# Altium PCB PCB2_v2.PcbDoc
Units mil, origin at the board's own origin, x right, y up, seen from the top; angles counter-clockwise.
Board outline 3972.44 x 4354.33 mil, 2 copper layers (Top Layer, Bottom Layer); 21 components, 15 nets, 119 pads, 3 vias.
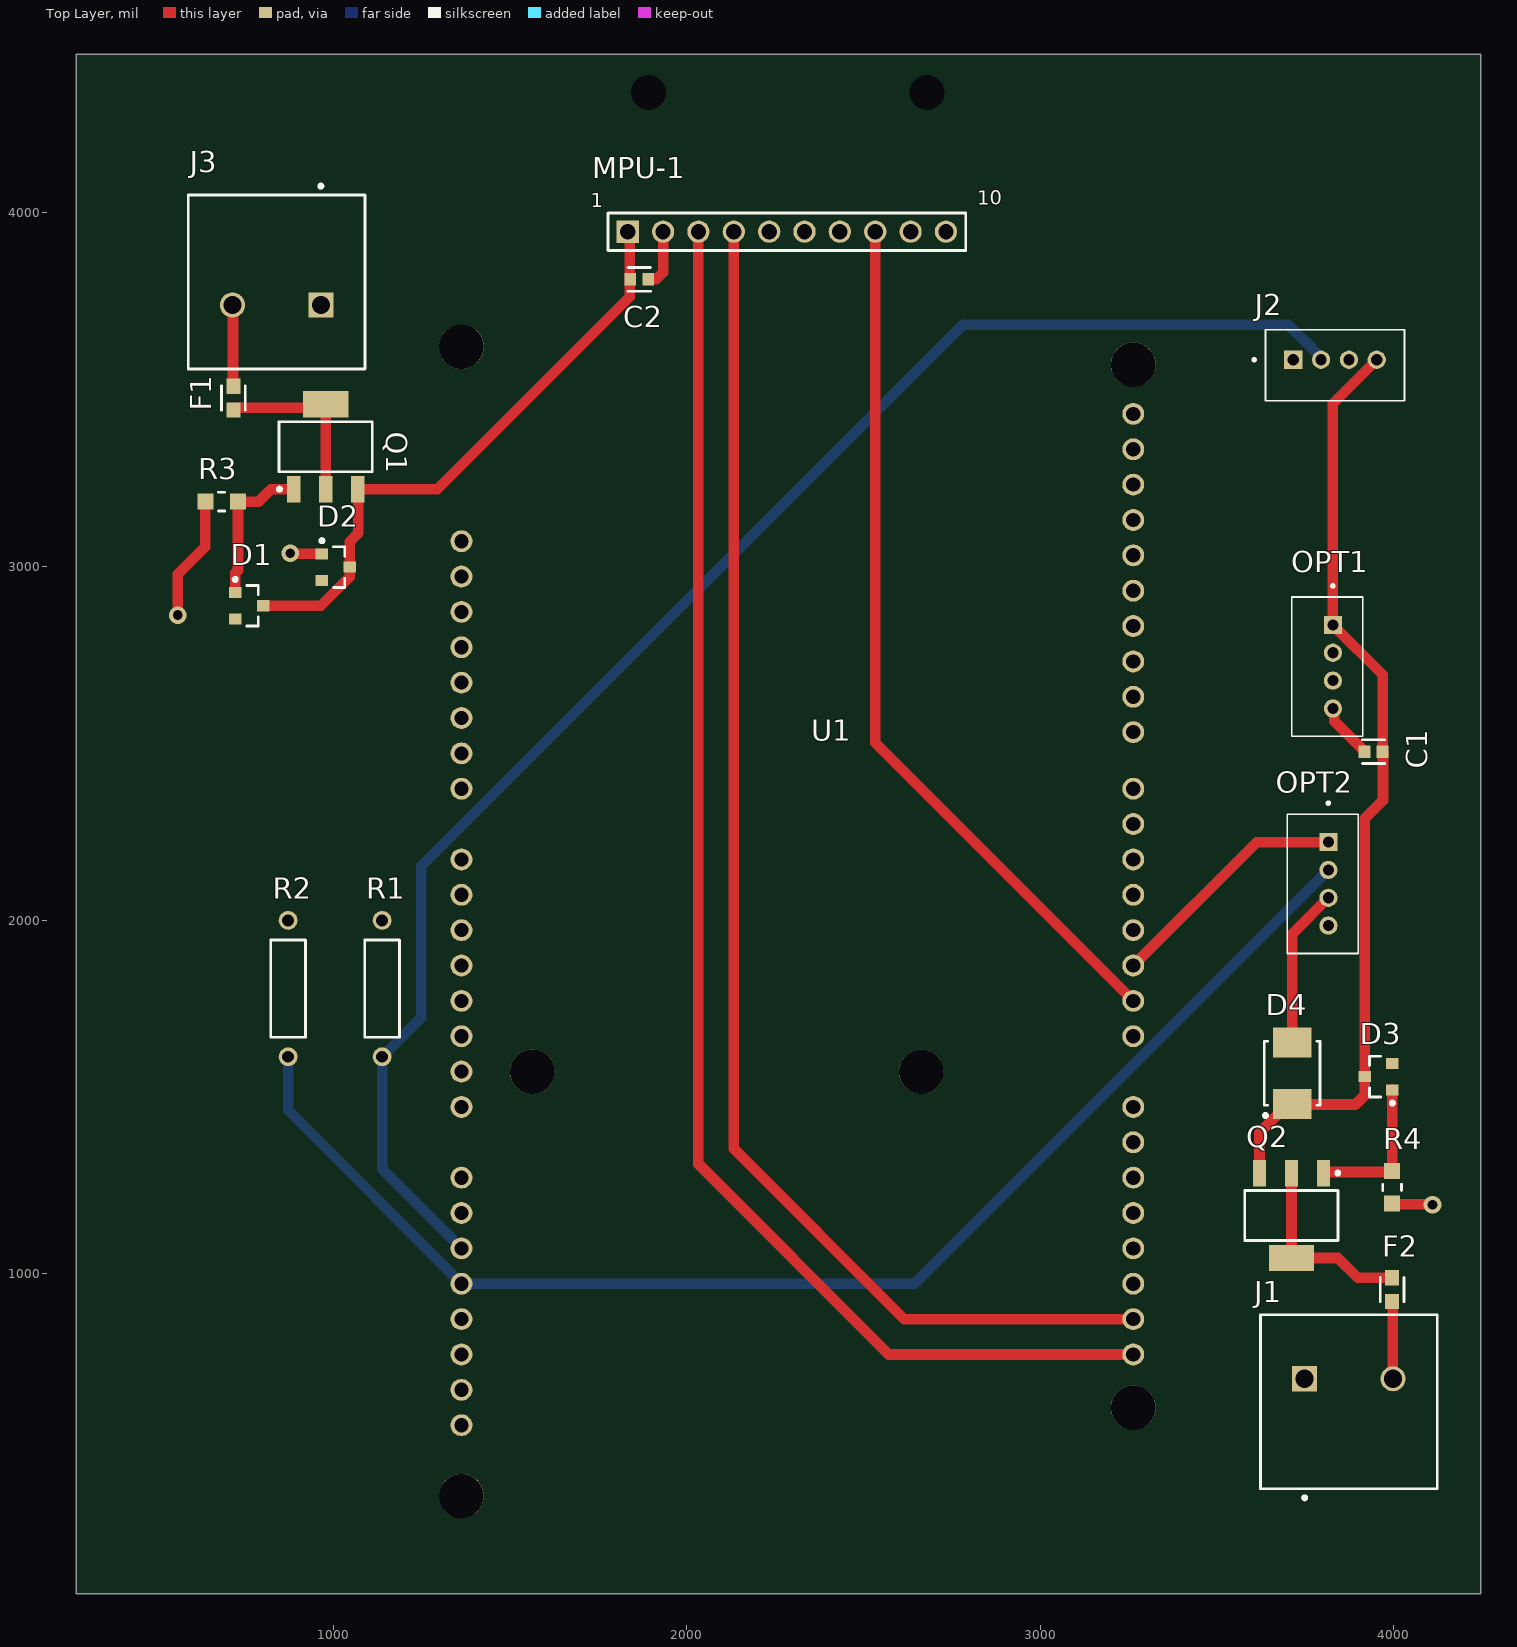
[diagram p0: Top Layer view]
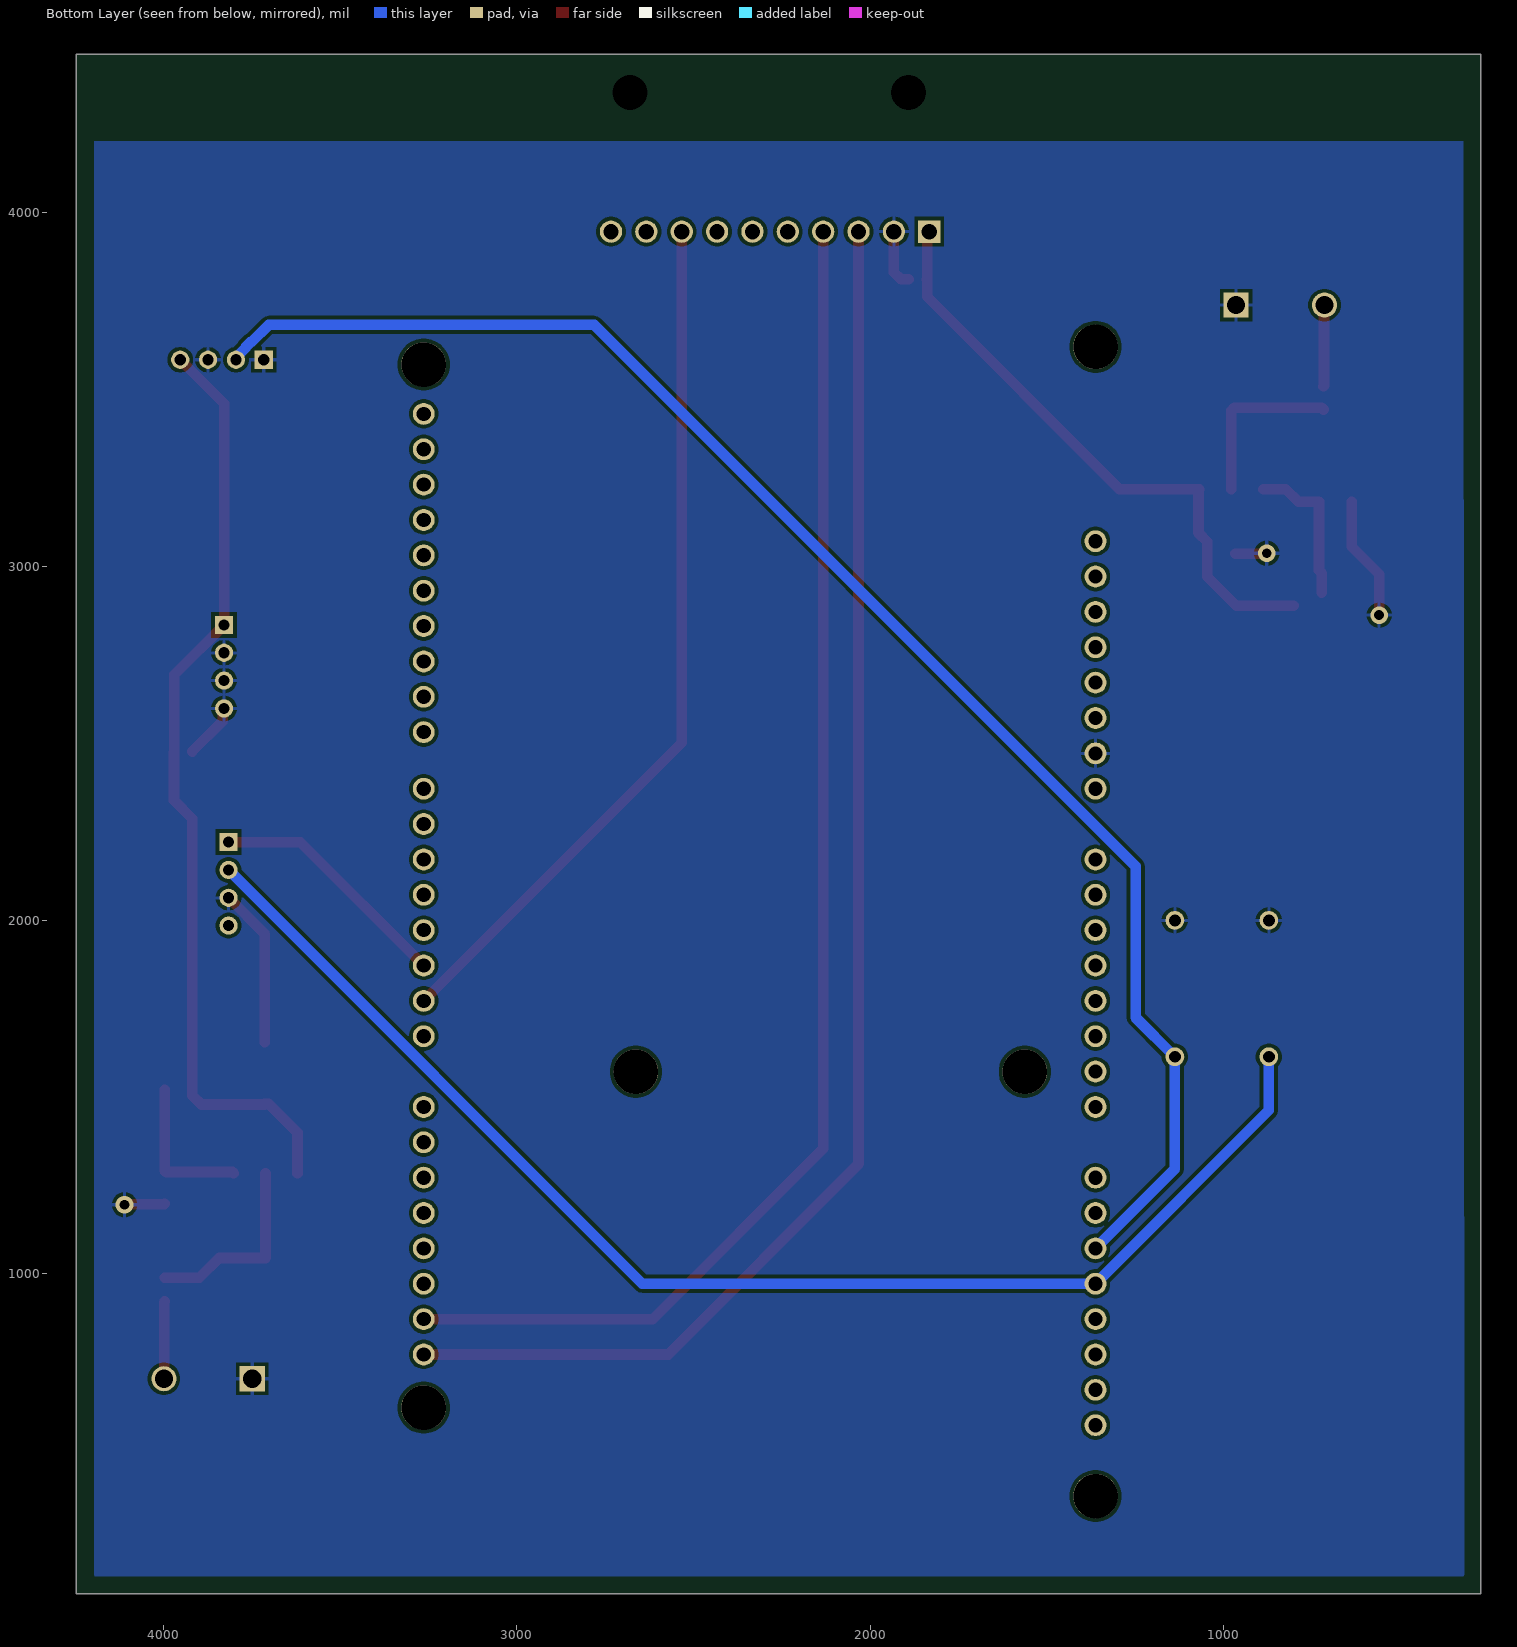
[diagram p1: Bottom Layer view, seen from below]

## Layer stack, top to bottom
Top Solder: solder mask 0.4, Solder Resist, Dk 3.5
Top Layer: signal copper 1.4
Dielectric 1: dielectric 12.6, FR-4, Dk 4.8
Bottom Layer: signal copper 1.4
Bottom Solder: solder mask 0.4, Solder Resist, Dk 3.5

## Board outline
273.62,94.49 4246.06,94.49 4246.06,4448.82 273.62,4448.82

## Design rules (kind name [scope] priority, off if disabled: settings)
Clearance [All] p1: gap=10 ignorepadtopadclearanceinfootprint=FALSE except(0: Arc-Hole Track-Hole SMDPad-Hole THPad-Hole Via-Hole Fill-Hole Poly-Hole Region-Hole Text-Hole)
PolygonConnect [All] p1: connectstyle=Relief reliefconductorwidth=10 reliefentries=4 polygonreliefangle="90 Angle" airgapwidth=10
RoutingVias [All] p1: holewidth=28 width=50 viastyle="Through Hole" minholewidth=28 minwidth=50 maxholewidth=28 maxwidth=50
SolderMaskExpansion [All] p1: expansion=4 istentingtop=FALSE
Width [All] p1: maxlimit=30 minlimit=10 preferedwidth=20 minimp=50.000000 maximp=50.000000 favimp=50.000000
30 further rules are at their usual default settings.

## Classes and differential pairs
component class "Protection Circuit 24V": D3 D4 F2 Q2 R4
component class "Protection Circuit 5V": D1 D2 F1 Q1 R3
component class PCB2_Schematic: C1 C2 J1 J3 MPU-1 OPT1 OPT2 R1 R2 U1

## Components (designator, comment, footprint, x,y, rotation, side; value= is the part's Value field where it differs from the comment)
C1 "C0603X104K5RACTU" FP-C0603-CJ-MFG 3942.91,2476.38 r180 top value=100nF
C2 "C0603X104K5RACTU" FP-C0603-CJ-MFG 1866.14,3812.01 r0 top value=100nF
D1 "Zener" ONSC-SOT-23-3-318-08_V 762.8,2888.78 r0 top
D2 "Zener" ONSC-SOT-23-3-318-08_V 1007.87,2998.03 r0 top
D3 "Zener 1" ONSC-SOT-23-3-318-08_V 3956.69,1557.09 r180 top
D4 "Zener 2" ONSC-SMB-2-403A-03_H_V 3712.6,1566.93 r90 top
F1 "1A Fuse" FP-0603SFS-MFG 718.5,3476.38 r270 top value=0.2Ω
F2 "1A Fuse" FP-0603SFS-MFG 3995.08,954.72 r90 top value=0.2Ω
J1 "Screw Conn." PHOE-1714955_V 3873.03,702.76 r0 top
J2 "AcuAmp" SEEED_110990030 3833.66,3584.65 r0 top
J3 "Screw Conn." PHOE-1714955_V 840.55,3739.17 r180 top
MPU-1 "61301011121" 61301011121 2283.46,3946.85 r0 top
OPT1 "110990030" SEEED_110990030 3827.76,2716.54 r270 top
OPT2 "110990030" SEEED_110990030 3814.96,2102.36 r270 top
Q1 "PMOS" FAIR-SOT223-4_V 979.33,3338.58 r90 top
Q2 "PMOS" FAIR-SOT223-4_V 3710.63,1164.37 r270 top
R1 "OD103JE" OMTE-RES7X2.5-2 1138.78,1806.1 r270 top
R2 "OD103JE" OMTE-RES7X2.5-2 873.03,1806.1 r270 top
R3 "100 kOhm" FP-CR0805-MFG 685.04,3183.07 r0 top
R4 "100 kOhms" FP-CR0805-MFG 3995.08,1244.09 r90 top
U1 "DUE_CONNECTOR" DUE_FOOTPRINT 1363.19,3071.46 r0 top

## Footprints (in the part's own frame and the unit in brackets; to place one, negate y for a bottom-side part, rotate by r counter-clockwise, add the part's x,y. Pads: shape width x height; smd on the part's side, far side on the other; paste and mask are expansions set on the pad)
61301011121 [mm] "Pin Header, pitch 2.54 mm, THT, Vertical, single row, 10p"
  rect 1.6x1.6 hole 1.1: 1(-11.43,0)
  round 1.6 hole 1.1: 2(-8.89,0) 3(-6.35,0) 4(-3.81,0) 5(-1.27,0) 6(1.27,0) 7(3.81,0) 8(6.35,0) 9(8.89,0) 10(11.43,0)
  silkscreen extent -12.85,-1.35 12.85,1.35, body extent -12.7,-1.27 12.7,1.27, height 8.57
DUE_FOOTPRINT [mm]
  round 1.57 hole 1.02: 0(0,0) 1(0,-2.54) 2(0,-5.08) 3(0,-7.62) 4(0,-10.16) 5(0,-12.7) 6(0,-15.24) 7(0,-17.78) 8(0,-22.86) 9(0,-25.4) 10(0,-27.94) 11(0,-30.48) 12(0,-33.02) 13(0,-35.56) 14(0,-38.1) 15(0,-40.64) 16(0,-45.72) 17(0,-48.26) 18(0,-50.8) 19(0,-53.34) 20(0,-55.88) 21(0,-58.42) 22(0,-60.96) 23(0,-63.5) 24(48.26,-58.42) 25(48.26,-55.88) 26(48.26,-53.34) 27(48.26,-50.8) 28(48.26,-48.26) 29(48.26,-45.72) 30(48.26,-43.18) 31(48.26,-40.64) 32(48.26,-35.56) 33(48.26,-33.02) 34(48.26,-30.48) 35(48.26,-27.94) 36(48.26,-25.4) 37(48.26,-22.86) 38(48.26,-20.32) 39(48.26,-17.78) 40(48.26,-13.716) 41(48.26,-11.176) 42(48.26,-8.636) 43(48.26,-6.096) 44(48.26,-3.556) 45(48.26,-1.016) 46(48.26,1.524) 47(48.26,4.064) 48(48.26,6.604) 49(48.26,9.144)
  body extent -1.27,-64.77 49.53,10.41, height 9.5
FAIR-SOT223-4_V [mm] "SOT223, 4-Leads, Body 6.7x3.7mm, Pitch 2.3mm"
  rect 1.9x0.95 smd: 1(-3.05,2.3) 2(-3.05,0) 3(-3.05,-2.3)
  rect 1.9x3.25 smd: 4(3.05,0)
  silkscreen extent -3.17,-3.35 1.8,3.45, body extent -3.5,-3.35 3.5,3.35, height 1.8
FP-0603SFS-MFG [mil]
  rect 43x39 smd paste+0 mask+0: 1(-33.5,0) 2(33.5,0)
  silkscreen extent -34,-33 34,33, body extent -59,-23 59,23, height 10
FP-C0603-CJ-MFG [mm]
  rect 0.85x0.9 smd paste+0 mask+0: 1(-0.65,0) 2(0.65,0)
  silkscreen extent -0.8,-0.85 0.8,0.85, body extent -1.2,-0.6 1.2,0.6, height 0.25
FP-CR0805-MFG [mm]
  rect 1.15x1.15 smd paste+0 mask+0: 1(-1.175,0) 2(1.175,0)
  silkscreen extent -0.23,-0.67 0.23,0.67, body extent -1.85,-0.77 1.85,0.77, height 0.25
OMTE-RES7X2.5-2 [mm] "Resistor, Axial; Body 7x2.5mm, Lead Dia. 0.6mm"
  round 1.35 hole 0.85: 1(-4.9,0) 2(4.9,0)
  silkscreen extent -3.5,-1.25 3.5,1.25, body extent -3.5,-1.25 3.5,1.25, height 2.5
ONSC-SMB-2-403A-03_H_V [mil] "Molded, 2-Leads, Body 4.6x3.95mm"
  rect 85x107.99 smd: 1(-87.01,0) 2(87.01,0)
  silkscreen extent -125,-79 91,81, body extent -91,-78 91,78, height 95
ONSC-SOT-23-3-318-08_V [mm] "SOT23, 3-Leads, Body 2.92x1.3mm, Pitch 0.95mm"
  rect 0.9x0.8 smd: 1(-1,0.95) 2(-1,-0.95) 3(1,0)
  silkscreen extent -1.12,-1.46 0.65,2.02, body extent -0.65,-1.46 0.65,1.46, height 1.11
PHOE-1714955_V [mm] "Terminal Block, 2-Leads, Body 12.7x12.5mm, Pitch 6.35mm"
  rect 1.8x1.8 hole 1.3: 1(-3.175,0)
  round 1.8 hole 1.3: 2(3.175,0)
  silkscreen extent -6.35,-8.67 6.35,4.6, body extent -6.92,-7.9 6.35,4.6, height 21.51
SEEED_110990030 [mm]
  rect 1.308x1.308 hole 0.8: 1(-3,0)
  round 1.308 hole 0.8: 2(-1,0) 3(1,0) 4(3,0)
  silkscreen extent -5.9,-2.95 5,2.15

## Part data
C1 C2: library part CMP-2006-03300-2, "CAP CER 0.1UF 50V X7R 0603", Capacitance=100nF, Manufacturer=Kemet, Package=C0603-CJ, Temperature="-55°C to +125°C", Temperature Characteristic=X7R, Temperature Coefficient=15%, Temperature Range High=+125°C, Temperature Range Low=-55°C, Tolerance=10%, Voltage=50V, Automotive=No, Category=Cap, ComponentLink2Description=Datasheet, ComponentLink2URL=https://content.kemet.com/datasheets/KEM_C1013_X7R_FT-CAP_SMD.pdf, Device Class L1="Passive Components", Device Class L2=Capacitors, Device Class L3="Ceramic Capacitors", Digikey Description="CAP CER 0.1UF 50V X7R 0603", Height=0.95mm, Ipc Land Pattern Name=CAPC16080X80, Lead Free=Yes, Manufacturer Part Number=C0603X104K5RACTU, Material=Ceramic, Mouser Description="Capacitor; Ceramic; Cap 0.1uF; Tol+10%; SMT; Flexible Termination; Vol-Rtg 50V; TR", Octopart=https://octopart.com/c0603x104k5ractu-kemet-9145062, RoHS=TRUE, Voltage Rating=50V
D1 D3: library part CMP-1060-01182-1, "Zener Voltage Regulator, 225 mW, 3-Pin SOT-23, Pb-Free, Tape and Reel", Manufacturer="On Semiconductor", PartNumber=MMBZ5245BLT3G, ComponentLink1Description="Manufacturer URL", ComponentLink1URL=http://www.onsemi.com/, ComponentLink2Description=Datasheet, ComponentLink2URL=http://www.onsemi.cn/pub_link/Collateral/MMBZ5221BLT1-D.PDF, ComponentLink3Description="Package Specification", ComponentLink3URL=http://www.onsemi.cn/pub_link/Collateral/318-08.PDF, DatasheetVersion="Rev. 12", Mounting Technology="Surface Mount", PackageDescription="3-Pin Small Outline Transistor, Body 2.92 x 1.3 mm, Pitch 0.95 mm", PackageReference=SOT-23-3-318-08, PackageVersion="Rev. AP, 11/2009", Packing="Tape and Reel", RoHS=Pb-Free, VZ Typ (V)=15
D2: library part CMP-1060-01193-1, "Zener Voltage Regulator, 225 mW, 3-Pin SOT-23, Pb-Free, Tape and Reel", Manufacturer="On Semiconductor", PartNumber=SZBZX84C39ET1G, ComponentLink1Description="Manufacturer URL", ComponentLink1URL=http://www.onsemi.com/, ComponentLink2Description=Datasheet, ComponentLink2URL=http://www.onsemi.com/pub_link/Collateral/BZX84C2V4ET1-D.PDF, ComponentLink3Description="Package Specification", ComponentLink3URL=http://www.onsemi.cn/pub_link/Collateral/318-08.PDF, DatasheetVersion="Rev. 8", Mounting Technology="Surface Mount", PackageDescription="3-Pin Small Outline Transistor, Body 2.92 x 1.3 mm, Pitch 0.95 mm", PackageReference=SOT-23-3-318-08, PackageVersion="Rev. AP, 11/2009", Packing="Tape and Reel", RoHS=Pb-Free
D4: library part CMP-1060-00141-1, "3 W Zener Voltage Regulator, 2-Pin SMB, Pb-Free, Tape and Reel", Manufacturer="On Semiconductor", PartNumber=1SMB5934BT3G, ComponentLink1Description="Manufacturer URL", ComponentLink1URL=http://www.onsemi.com/, ComponentLink2Description=Datasheet, ComponentLink2URL=http://www.onsemi.com/pub_link/Collateral/1SMB5913BT3-D.PDF, ComponentLink3Description="Package Specification", ComponentLink3URL=http://www.onsemi.com/pub_link/Collateral/1SMB5913BT3-D.PDF, DatasheetVersion="Rev. 8", Mounting Technology="Surface Mount", PackageDescription="2-Pin Small Molded Package, J-Bend Lead, Body 4.33 x 3.625 mm", PackageReference=SMB-2-403A-03_H, PackageVersion="Rev. H, 05/2011", Packing="Tape and Reel", RoHS=Pb-Free, VZ Typ (V)=24
F1 F2: library part CMP-08605-000034-1, "FUSE BOARD MOUNT 1A 32VDC 0603", Fuse Current=1A, Fuse Interrupt Dc Current=50A, Manufacturer=Littelfuse, Manufacturer Part Number=0603SFS100F/32-2, Max Fuse Dc Voltage=32V, Package=0603SFS, Resistance=0.2Ω, Temperature="-55°C to +125°C", Temperature Range High=+125°C, Temperature Range Low=-55°C, Automotive=No, Category=Fuse, ComponentLink2Description=Datasheet, ComponentLink2URL=https://www.littelfuse.com/~/media/electronics/datasheets/fuses/littelfuse_fuse_sfs_datasheet.pdf.pdf, Device Class L1="Circuit Protection", Device Class L2=Fuses, Device Class L3=unset, Digikey Description="FUSE BOARD MOUNT 1A 32VDC 0603", Fuse Blow Speed=Slow, Fuse I2T=0.093A2Sec, Height=0.95mm, Ipc Land Pattern Name=CAPC16080X80, Lead Free=Yes, Octopart=https://octopart.com/0603sfs100f%2F32-2-littelfuse-74214378, RoHS=TRUE, Voltage Rating=32V
J1 J3: library part CMP-2000-05797-1, "PC Terminal Block, Pitch 6.35 mm, 1 x 2 Position, Height 21.5 mm, Tail Lenght 5.1 mm, RoHS, Bulk", Manufacturer="Phoenix Contact", Package Description="PC Terminal Block, Pitch 6.35 mm, 1 x 2 Position, Height 21.5 mm, Tail Lenght 5.1 mm", Package Reference=1714955, Datasheet URL=http://media.digikey.com/pdf/Data%20Sheets/Phoenix%20Contact%20PDFs/1714955.pdf, Datasheet Version=02/2010, Manufacturer URL=http://www.phoenixcontact.com/, Mounting Technology=ThroughHole
J2: library part 110990030, "GROVE 2MM 4PIN VERT CONN 10PCS", Package=None, Arrow_Electronics-Purchase-URL=https://snapeda.com/shop?store=Arrow+Electronics&id=583576, Availability=Good, Check_prices=https://www.snapeda.com/parts/110990030/Seeed%20Technology%20Co.,%20Ltd/view-part/583576/?ref=eda, MF="Seeed Technology", Mouser-Purchase-URL=https://snapeda.com/shop?store=Mouser&id=583576, MP=110990030, Price=None, SnapEDA_Link=https://www.snapeda.com/parts/110990030/Seeed%20Technology%20Co.,%20Ltd/view-part/583576/?ref=snap
MPU-1: library part CMP-1502-01082-1, "THT Vertical Pin Header WR-PHD, Pitch 2.54 mm, Single Row, 10 pins", Contact Resistance=20mOhm, Manufacturer="Wurth Elektronik", Operating Temperature=-40to105degC, Rated Current=3A, Withstanding Voltage=500VAC, Working Voltage=250VAC, Datasheet URL=https://katalog.we-online.de/em/datasheet/6130xx11121.pdf, Gender=Male, Manufacturer URL=http://www.we-online.de, Mounting Technology=THT, Orientation=Vertical, Package Reference=61301011121, Packaging=Bag, Part Number=61301011121, Pin Number=10, Pitch=2.54mm, Publisher=WurthElektronik, Row Number=Single
OPT1 OPT2: "GROVE 2MM 4PIN VERT CONN 10PCS", Package=None, Arrow_Electronics-Purchase-URL=https://snapeda.com/shop?store=Arrow+Electronics&id=583576, Availability=Good, Check_prices=https://www.snapeda.com/parts/110990030/Seeed%20Technology%20Co.,%20Ltd/view-part/583576/?ref=eda, MF="Seeed Technology", Mouser-Purchase-URL=https://snapeda.com/shop?store=Mouser&id=583576, MP=110990030, Price=None, SnapEDA_Link=https://www.snapeda.com/parts/110990030/Seeed%20Technology%20Co.,%20Ltd/view-part/583576/?ref=snap
Q1 Q2: library part CMP-2000-06838-1, "P-Channel Enhancement Mode Field Effect Transistor, 60 V, 2.5 A, -55 to 150 degC, 4-Pin SOT223, RoHS, Tape and Reel", Drain-Source On Resistance-Max=300mO, Drain-to-Source Voltage [Vdss]=60V, Manufacturer="Fairchild Semiconductor", Package Description="4-Pin Small Outline Transistor, Body 6.45 x 3.5 mm, Pitch 2.3 mm", Package Reference=SOT223-4, Package Version="Rev. 3, 07/2016", Rated Power Dissipation=3W, Channel Type=P-Channel, Datasheet URL=http://www.mouser.com/ds/2/149/NDT2955-116189.pdf, Datasheet Version="Rev. 1.4, 04/2015", Manufacturer URL=https://www.fairchildsemi.com/, Mounting Technology=SurfaceMount, Package URL=https://www.fairchildsemi.com.cn/package-drawings/MA/MA04A.pdf, Qg Gate Charge=15nC
R1 R2: library part CMP-2000-06865-1, "Little Demon(R) Carbon Composition Molded OD Series, 250 V, 10 KOhm, +/-5%, -70 to 130 degC, 2-Pin THD, RoHS, Bulk", Manufacturer=Ohmite, Operating Temperature=-, Package / Case=Axial, Package Description="2-Pin THD Resistor, Body 7 x 2.5 mm, Lead Dia. 0.6 mm", Package Reference=RES7X2.5, Power (Watts)=0.25W,1/4W, Power Rating=0.25W, Resistance (Ohms)=10k, Standard Package=100, Tolerance=±5%, Catalog Drawings=OD,OF,OASeries, Category=Resistors, Composition=CarbonComposition, Datasheet URL=http://www.ohmite.com/cat/res_od_of_oa.pdf, Datasheet Version=06/2016, EDA / CAD Models=DownloadfromAcceleratedDesigns, Family=ThroughHoleResistors, Features=PulseWithstanding, Height=-, Manufacturer URL=http://www.ohmite.com/, Mounting Technology=ThroughHole, Number of Terminations=2, Online Catalog=OD,OF,OASeries,LittleDemon®, Packaging=Bulk, PartNumber=OD103JE, RoHS Information="LittleDemon\"E\"SeriesMaterialDeclaration", Series=LittleDemon®OD, Size / Dimension="0.098\"Diax0.276\"L(2.50mmx7.00mm)", Supplier Device Package=Axial, Temperature Coefficient=-
R3 R4: library part CMP-07231-001707-1, "Thick Film Chip Resistors 0805 100kΩ 0.125W 5% 200ppm/°C", Case Code (Imperial)=0805, Case Code (Metric)=2012, Max Operating Temperature=155°C, Max Power Dissipation=125mW, Min Operating Temperature=-55°C, Package Quantity=10000, Resistance=100kR, Temperature Coefficient=200ppm/°C, Tolerance=5%, Voltage Rating=150V, Case/Package=0805, Composition="Thick Film", Contact Plating=Tin, Depth=1.25mm, Features="Moisture Resistant", Height=0.024inch, Length=0.079inch, Military Standard=Not, Mount="Surface Mount", Number of Terminations=2, Packaging="Tape and Reel", Power Rating=125mW, Radiation Hardening=No, Termination=SMD/SMT, Thickness=508um, Width=0.049inch

## Free pads (board coordinates)
  round 59.06 hole 98.43: 28(1892.52,4340.55) 29(2679.92,4340.55)
  round 125.98 hole 125.98 unplated: MH1(1363.19,371.06) MH2(3263.19,3571.06) MH3(3263.19,621.06) MH4(1363.19,3621.06) MH5(2663.19,1571.06) MH6(1563.19,1571.06)

## Via types
v1: diameter 50, hole 28, Top Layer to Bottom Layer, 3 vias

## Nets (pads, with @x,y where several pads share a name; then routed paths per layer and width w, separated by ;. In a path a pad name is that pad's centre, name@x,y a point inside that pad or via, vN(x,y) a via of type N, cw(c..) or ccw(c..) an arc to the next point about the centre after c; other vN are vias at no path point)
24V: C1.1 D3.3 D4.1 J2.4 OPT1.1 Q2.3 | length 2668.9
  Top Layer w30: Q2.3 3620.08,1398.9 3701.1,1479.92 D4.1 3714.17,1478.35 3891.73,1478.35 3917.32,1503.94 D3.3 3917.32,2286.42 3969.49,2338.58 3969.49,2475.39 C1.1 3968.5,2693.9 OPT1.1 3827.76,3460.63 J2.4
Cont/Err_out: OPT2.1 U1.34 | length 696.3
  Top Layer w30: U1.34 3612.2,2220.47 OPT2.1
Current_Sense: J2.2 R1.2 U1.18 | length 4443.9
  Bottom Layer w30: U1.18 1138.78,1295.87 R1.2 1250,1724.41 1250,2152.56 2780.51,3683.07 3701.68,3683.07 3749.36,3635.39 3751.65,3635.39 3766.3,3620.75 3766.3,3618.45 3794.29,3590.46 J2.2
GND: C1.2 C2.2 D2.1 D4.2 J1.1 J2.1 J2.3 J3.1 MPU-1.2 OPT1.2 OPT1.3 OPT1.4 OPT2.3 R1.1 R2.1 R3.1 R4.1 U1.6 | length 1334.3
  Top Layer w30: v1(561.02,2862.2) 561.02,2978.35 638.78,3056.1 R3.1 ; v1(878.94,3037.4) 880.16,3036.18 967.76,3036.18 D2.1 ; C2.2 1913.39,3812.01 1933.46,3832.09 MPU-1.2 ; D4.2 3712.6,1960.63 OPT2.3 ; OPT1.4 3831.87,2594.31 3831.87,2562.82 3917.32,2477.36 C1.2 ; R4.1 3996.56,1196.36 4107.78,1196.36 v1(4109.25,1194.88)
Light: OPT2.2 R2.2 U1.19 | length 3781.3
  Bottom Layer w30: R2.2 873.03,1461.61 U1.19 2644.68,971.46 OPT2.2
NetC2_1: C2.1 D1.3 D2.3 MPU-1.1 Q1.3 | length 1720.4
  Top Layer w30: D1.3 965.47,2888.78 1047.24,2970.55 D2.3 1047.24,3069.88 1071.85,3094.49 1071.85,3216.54 Q1.3 1295.28,3218.5 1839.57,3762.8 1839.57,3811.02 C2.1 1838.82,3813.74 1838.82,3941.5 MPU-1.1
NetD1_1: D1.1 Q1.1 R3.2 | length 432.3
  Top Layer w30: D1.1 723.43,2981.3 731.3,2989.17 R3.2 789.37,3183.07 824.8,3218.5 Q1.1
NetD3_1: D3.1 Q2.1 R4.2 | length 426.1
  Top Layer w30: Q2.1 3804.13,1287.4 3992.13,1287.4 R4.2 3995.57,1290.85 3995.57,1519.19 D3.1
NetF1_1: F1.1 J3.2 | length 230.5
  Top Layer w30: J3.2 717.03,3737.7 717.03,3511.35 F1.1
NetF1_2: F1.2 Q1.2 Q1.4 | length 490.1
  Top Layer w30: F1.2 718.5,3444.88 723,3449.38 970.05,3449.38 979.33,3440.09 Q1.2
NetF2_1: F2.1 J1.2 | length 219.7
  Top Layer w30: F2.1 3996.56,919.75 3996.56,704.23 J1.2
NetF2_2: F2.2 Q2.2 Q2.4 | length 547.8
  Top Layer w30: Q2.2 Q2.4 3841.54,1044.29 3897.6,988.22 F2.2
NetMPU-1_3: MPU-1.3 U1.24 | length 4089.6
  Top Layer w30: MPU-1.3 2033.46,2487.2 2033.46,1310.04 2572.05,771.46 U1.24
NetMPU-1_4: MPU-1.4 U1.25 | length 3922.6
  Top Layer w30: MPU-1.4 2133.46,1353.74 2615.75,871.46 U1.25
NetMPU-1_8: MPU-1.8 U1.33 | length 2477.7
  Top Layer w30: MPU-1.8 2533.46,2501.18 U1.33
pads on no net: D1.2 D2.2 D3.2 MPU-1.5 MPU-1.6 MPU-1.7 MPU-1.9 MPU-1.10 OPT2.4 U1.0 U1.1 U1.2 U1.3 U1.4 U1.5 U1.7 U1.8 U1.9 U1.10 U1.11 U1.12 U1.13 U1.14 U1.15 U1.16 U1.17 U1.20 U1.21 U1.22 U1.23 U1.26 U1.27 U1.28 U1.29 U1.30 U1.31 U1.32 U1.35 U1.36 U1.37 U1.38 U1.39 U1.40 U1.41 U1.42 U1.43 U1.44 U1.45 U1.46 U1.47 U1.48 U1.49

## Polygon pours and split planes (outlines as drawn)
GND on Bottom Layer "GND_L02_P000" (solid, pour order 0): 323.82,4203.74 318.9,4203.74 319.88,4202.76 4194.88,4202.76 4194.88,146.65 4192.91,144.68 319.88,144.68

## Text inside footprints (layer, text, board x,y; h text height)
MPU-1: Top Overlay "10" at 2821.85,4022.64 h40; Top Overlay "1" at 1729.33,4015.75 h40